# Altium PCB Temperature_Sensor.PcbDoc
Units mm, origin at the board's own origin, x right, y up, seen from the top; angles counter-clockwise.
Board outline 44.14 x 25.42 mm, 2 copper layers (Top Layer, Bottom Layer); 28 components, 20 nets, 102 pads, 11 vias.
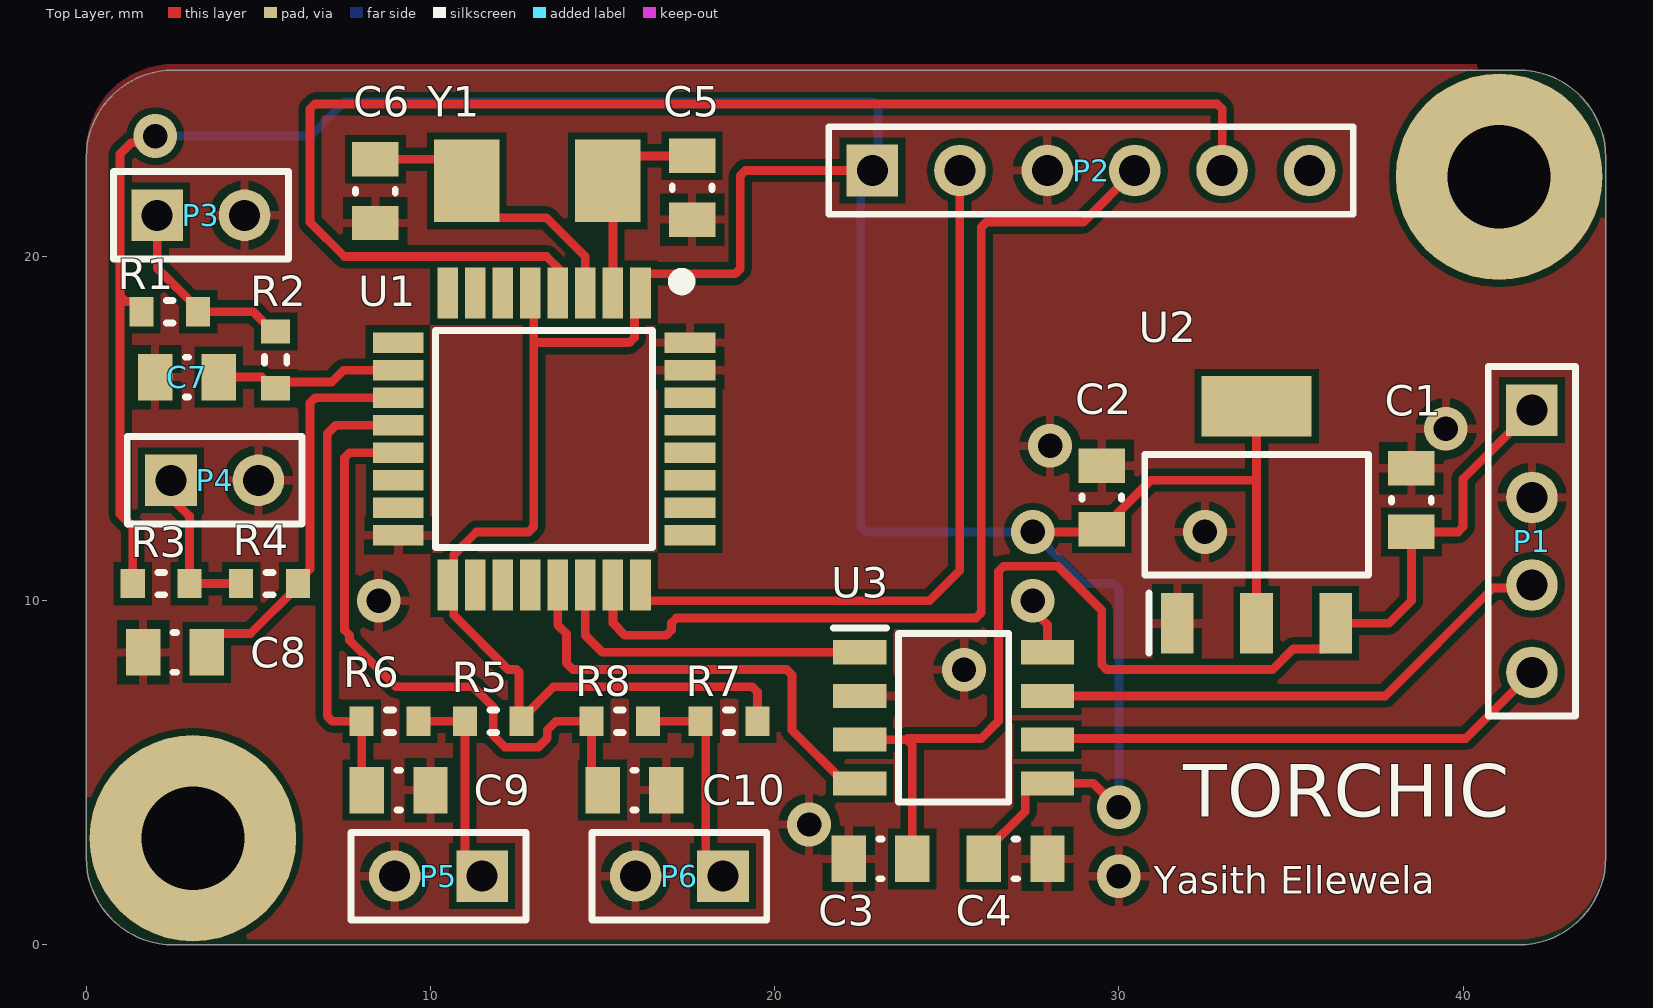
[diagram p0: Top Layer view]
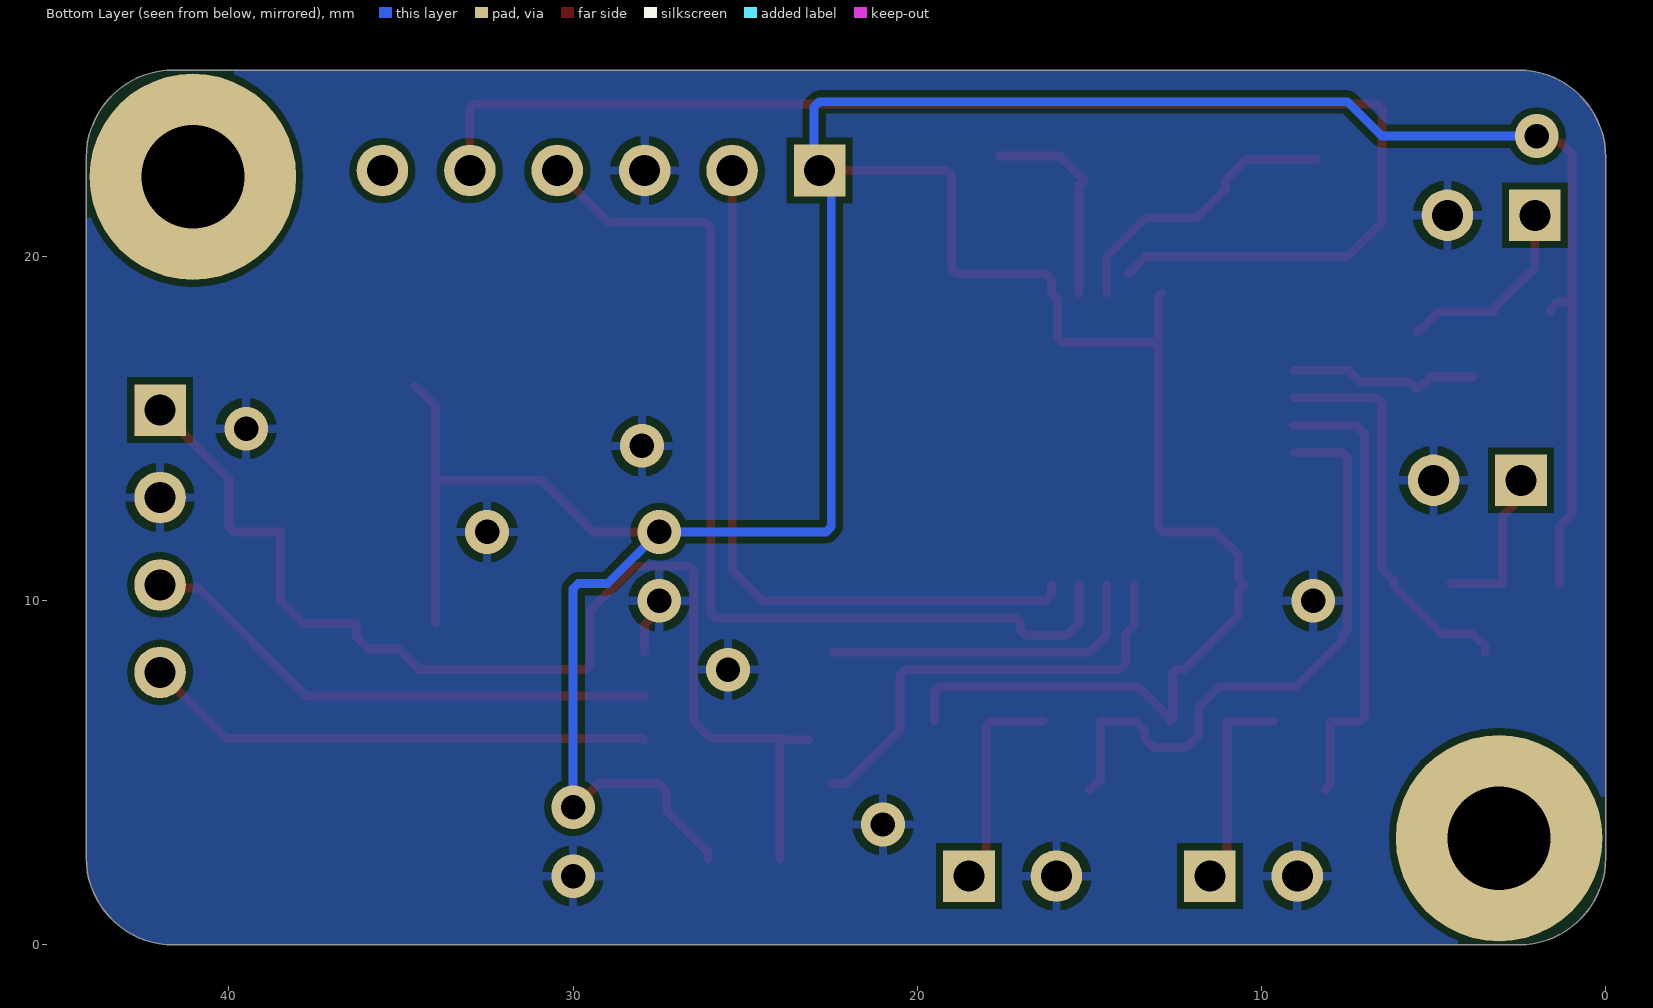
[diagram p1: Bottom Layer view, seen from below]
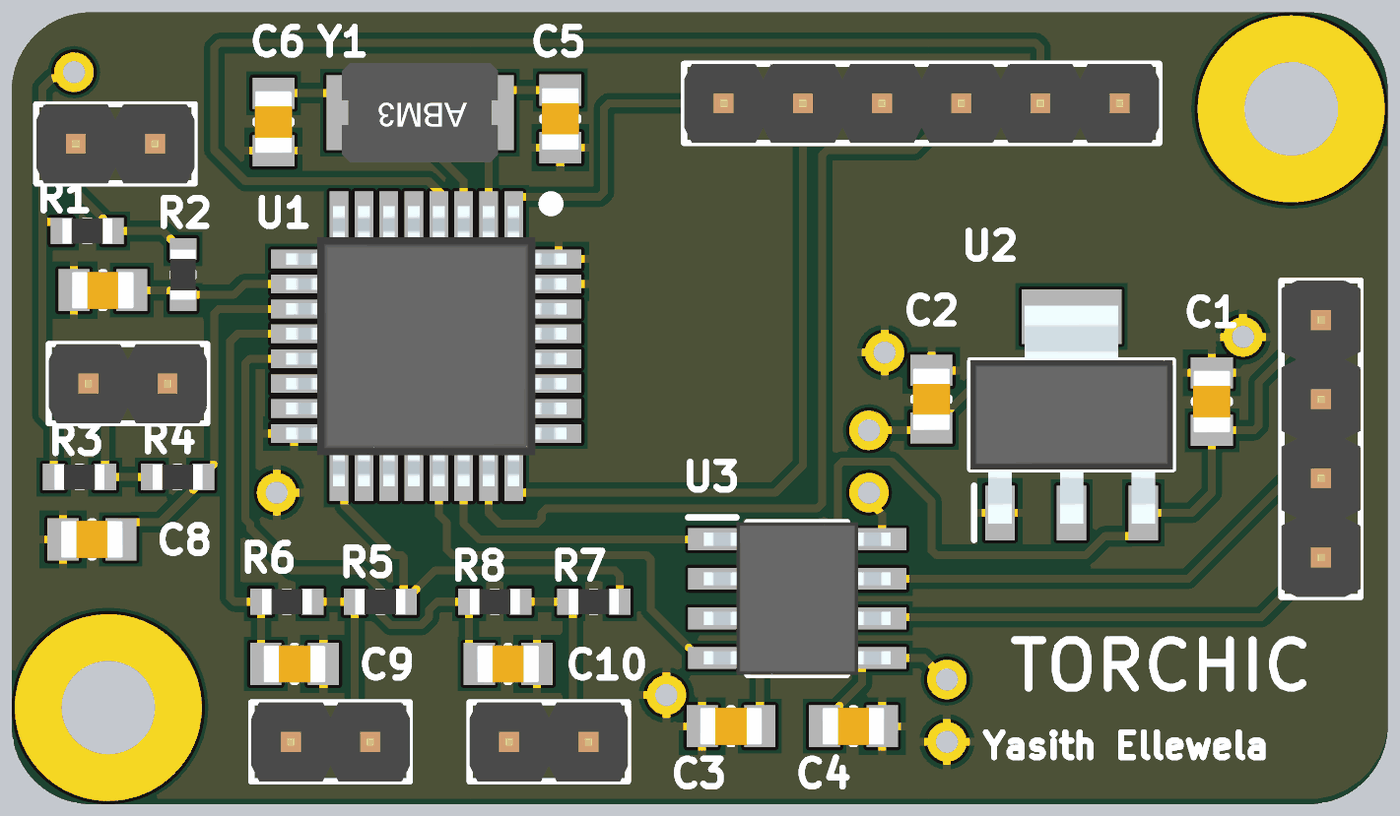
[diagram p2: 3D render of the assembled board from above, using the file's embedded part models]

## Layer stack, top to bottom
Top Solder: solder mask 0.0102, Solder Resist, Dk 3.5
Top Layer: signal copper 0.0356
Dielectric 1: dielectric 0.32, FR-4, Dk 4.8
Bottom Layer: signal copper 0.0356
Bottom Solder: solder mask 0.0102, Solder Resist, Dk 3.5

## Board outline
2.54,0 cw(c2.54,2.54) 0,2.54 0,22.88 cw(c2.54,22.88) 2.54,25.42 41.604,25.42 cw(c41.604,22.88) 44.144,22.88 44.144,2.54 cw(c41.604,2.54) 41.604,0

## Design rules (kind name [scope] priority, off if disabled: settings)
Clearance [All] p1: gap=0.2 ignorepadtopadclearanceinfootprint=TRUE except(0.15: Fill-Text Poly-Text Region-Text)
DiffPairsRouting [All] p1: maxlimit=0.254 minlimit=0.254 mostfreqgap=0.254 substack1={6880419E-5F7E-40DC-B808-49A93CB59D2A} toplayer_{6880419e-5f7e-40dc-b808-49a93cb59d2a}_minwidth=0.381 toplayer_{6880419e-5f7e-40dc-b808-49a93cb59d2a}_maxwidth=0.381 toplayer_{6880419e-5f7e-40dc-b808-49a93cb59d2a}_prefwidth=0.381 bottomlayer_{6880419e-5f7e-40dc-b808-49a93cb59d2a}_minwidth=0.381 bottomlayer_{6880419e-5f7e-40dc-b808-49a93cb59d2a}_maxwidth=0.381 bottomlayer_{6880419e-5f7e-40dc-b808-49a93cb59d2a}_prefwidth=0.381 toplayer_minwidth=0.381 toplayer_maxwidth=0.381 toplayer_prefwidth=0.381 bottomlayer_minwidth=0.381 bottomlayer_maxwidth=0.381 bottomlayer_prefwidth=0.381 maxuncoupledlength=12.7
MinimumSolderMaskSliver [All] p1: minsoldermaskwidth=0.196
PolygonConnect [All] p1: connectstyle=Relief reliefconductorwidth=0.254 reliefentries=4 polygonreliefangle="90 Angle" airgapwidth=0.254
RoutingVias [All] p1: holewidth=0.711 width=1.27 viastyle="Through Hole" minholewidth=0.711 minwidth=1.27 maxholewidth=0.711 maxwidth=1.27
SilkToSolderMaskClearance [IsPad] p1: minsilkscreentomaskgap=0.15 clearancetoexposedcopper=TRUE
SolderMaskExpansion [All] p1: expansion=0.102 istentingtop=FALSE
Width [All] p1: maxlimit=0.508 minlimit=0.254 preferedwidth=0.254 substack1={6880419E-5F7E-40DC-B808-49A93CB59D2A} toplayer_{6880419e-5f7e-40dc-b808-49a93cb59d2a}_maxwidth=0.254 bottomlayer_{6880419e-5f7e-40dc-b808-49a93cb59d2a}_maxwidth=0.254 minimp=50.000000 maximp=50.000000 favimp=50.000000
27 further rules are at their usual default settings.

## Components (designator, comment, footprint, x,y, rotation, side; value= is the part's Value field where it differs from the comment)
C1 "Capacitor - Nonpolarized" "0805 - Capacitor" 38.5,12.925 r270 top value=10uF
C2 "Capacitor - Nonpolarized" "0805 - Capacitor" 29.5,13 r270 top value=10uF
C3 "Capacitor - Nonpolarized" "0805 - Capacitor" 23.075,2.5 r0 top value=100nF
C4 "Capacitor - Nonpolarized" "0805 - Capacitor" 27,2.5 r180 top value=100nF
C5 "Capacitor - Nonpolarized" "0805 - Capacitor" 17.6,22 r270 top value=27pF
C6 "Capacitor - Nonpolarized" "0805 - Capacitor" 8.4,21.9 r270 top value=27pF
C7 "Capacitor - Nonpolarized" "0805 - Capacitor" 2.925,16.5 r0 top value=47nF
C8 "Capacitor - Nonpolarized" "0805 - Capacitor" 2.575,8.5 r0 top value=47nF
C9 "Capacitor - Nonpolarized" "0805 - Capacitor" 9.075,4.5 r180 top value=47nF
C10 "Capacitor - Nonpolarized" "0805 - Capacitor" 15.925,4.5 r180 top value=47nF
P1 "1x4 Header" HDR1X4 42,15.54 r270 top
P2 "1x6 Header" HDR1X6 22.84,22.5 r0 top
P3 "NTC THERMISTOR" HDR1X2 2.06,21.2 r0 top
P4 "NTC THERMISTOR" HDR1X2 2.46,13.5 r0 top
P5 "NTC THERMISTOR" HDR1X2 11.5,2 r180 top
P6 "NTC THERMISTOR" HDR1X2 18.5,2 r180 top
R1 "Resistor" "0603 - Resistor" 2.425,18.4 r180 top value=10K
R2 "Resistor" "0603 - Resistor" 5.5,17 r270 top value=500m
R3 "Resistor" "0603 - Resistor" 2.175,10.5 r180 top value=10K
R4 "Resistor" "0603 - Resistor" 5.325,10.5 r0 top value=500m
R5 "Resistor" "0603 - Resistor" 11.825,6.5 r0 top value=10K
R6 "Resistor" "0603 - Resistor" 8.825,6.5 r180 top value=500m
R7 "Resistor" "0603 - Resistor" 18.675,6.5 r0 top value=10K
R8 "Resistor" "0603 - Resistor" 15.5,6.5 r180 top value=500m
U1 "STM32F303K6T6" QFP80P900X900X160-32N 13.3,14.7 r270 top
U2 "TLV1117-33IDCYR" TLV1117 34,12.5 r90 top
U3 "TJA1051T_3,118" TJA1051T/3,118 25.2,6.6 r0 top
Y1 "Oscillator" "2-SMD NO LEAD CRSYSTAL" 13.1,22.2 r180 top

## Footprints (in the part's own frame and the unit in brackets; to place one, negate y for a bottom-side part, rotate by r counter-clockwise, add the part's x,y. Pads: shape width x height; smd on the part's side, far side on the other; paste and mask are expansions set on the pad)
"2-SMD NO LEAD CRSYSTAL" [mm]
  rect 1.9x2.4 smd: 1(-2.05,0) 2(2.05,0)
  body extent -2.5,-1.6 2.5,1.6, height 1.3
"0603 - Resistor" [mm] "0603 Chip Resistor - IPC Medium Density"
  rect 0.7x0.85 smd: 1(-0.825,0) 2(0.825,0)
  silkscreen extent -0.1,-0.33 0.1,0.33, body extent -0.8,-0.4 0.8,0.4, height 0.45
"0805 - Capacitor" [mm] "0805 Chip Capacitor - IPC Medium Density"
  rect 1x1.35 smd: 1(-0.925,0) 2(0.925,0)
  silkscreen extent -0.05,-0.58 0.05,0.58, body extent -1,-0.6 1,0.6, height 1.2
HDR1X2 [mm] "Connector; Header; 2 Position"
  rect 1.5x1.5 hole 0.9: 1(0,0)
  round 1.5 hole 0.9: 2(2.54,0)
  silkscreen extent -1.27,-1.27 3.81,1.27, body extent -1.27,-1.27 3.81,1.27, height 8.54
HDR1X4 [mm] "Connector; Header; 4 Position"
  rect 1.5x1.5 hole 0.9: 1(0,0)
  round 1.5 hole 0.9: 2(2.54,0) 3(5.08,0) 4(7.62,0)
  silkscreen extent -1.27,-1.27 8.89,1.27, body extent -1.27,-1.27 8.89,1.27, height 8.54
HDR1X6 [mm] "Connector; Header; 6 Position"
  rect 1.5x1.5 hole 0.9: 1(0,0)
  round 1.5 hole 0.9: 2(2.54,0) 3(5.08,0) 4(7.62,0) 5(10.16,0) 6(12.7,0)
  silkscreen extent -1.27,-1.27 13.97,1.27, body extent -1.27,-1.27 13.97,1.27, height 8.54
QFP80P900X900X160-32N [mm]
  rect 1.475x0.6 smd: 1(-4.238,2.8) 2(-4.238,2) 3(-4.238,1.2) 4(-4.238,0.4) 5(-4.238,-0.4) 6(-4.238,-1.2) 7(-4.238,-2) 8(-4.238,-2.8) 17(4.238,-2.8) 18(4.238,-2) 19(4.238,-1.2) 20(4.238,-0.4) 21(4.238,0.4) 22(4.238,1.2) 23(4.238,2) 24(4.238,2.8)
  rect 0.6x1.475 smd: 9(-2.8,-4.238) 10(-2,-4.238) 11(-1.2,-4.238) 12(-0.4,-4.238) 13(0.4,-4.238) 14(1.2,-4.238) 15(2,-4.238) 16(2.8,-4.238) 25(2.8,4.238) 26(2,4.238) 27(1.2,4.238) 28(0.4,4.238) 29(-0.4,4.238) 30(-1.2,4.238) 31(-2,4.238) 32(-2.8,4.238)
  silkscreen extent -4.77,-3.15 3.15,4.2, body extent -4.5,-4.5 4.5,4.5, height 1.6
TJA1051T/3,118 [mm] "SOIC127P600X175-8N"
  rect 1.55x0.7 smd: 1(-2.725,1.905) 2(-2.725,0.635) 3(-2.725,-0.635) 4(-2.725,-1.905) 5(2.725,-1.905) 6(2.725,-0.635) 7(2.725,0.635) 8(2.725,1.905)
  silkscreen extent -3.5,-2.45 1.6,2.61, body extent -3,-2.45 3,2.45, height 1.75
TLV1117 [mm] "SOT230P700X180-4N"
  rect 1.75x0.95 smd: 1(-3.15,2.3) 2(-3.15,0) 3(-3.15,-2.3)
  rect 1.75x3.2 smd: 2(3.15,0)
  silkscreen extent -4.03,-3.25 1.75,3.25, body extent -3.5,-3.25 3.5,3.25, height 1.8

## Part data
C1 C2 C3 C4 C5 C6 C7 C8 C9 C10: "Nonpolarized Capacitor"
P1: "1x4 Pin Header"
P2: "1x6 Pin Header"
P3 P4 P5 P6: library part "1x2 Header", "1x2 Pin Header"
U1: "Integrated Circuit"
U2: "Linear Voltage Regulator IC 3.3V 800MA SOT223-4", Manufacturer="Texas Instruments", Supplier Part Number=296-21112-1-ND, Datasheet=http://www.ti.com/lit/ds/symlink/tlv1117.pdf?HQS=TI-null-null-digikeymode-df-pf-null-wwe&ts=1590668900314, Manufacturer Part Number=TLV1117-33IDCYR, Supplier=Digikey
U3: "CAN Transceiver IC 4.5V-5.5V 250ns", Manufacturer=NXP, Manufacturer Part Number=TJA1051T/3,118, Supplier Part Number=568-8684-1-ND, Datasheet=http://www.nxp.com/docs/en/data-sheet/TJA1051.pdf, Supplier=Digikey
Y1: "Crystal Oscillator"

## Free pads (board coordinates)
  round 6 hole 3: MOUNT1(41.044,22.32) MOUNT2(3.1,3.1)

## Via types
v1: diameter 1.27, hole 0.711, Top Layer to Bottom Layer, 11 vias

## Nets (pads, with @x,y where several pads share a name; then routed paths per layer and width w, separated by ;. In a path a pad name is that pad's centre, name@x,y a point inside that pad or via, vN(x,y) a via of type N, cw(c..) or ccw(c..) an arc to the next point about the centre after c; other vN are vias at no path point)
+3.3V: C2.2 C4.2 P2.1 R1.2 R3.2 R5.2 R7.2 U1.1 U1.5 U1.17 U2.2 U3.5 | length 121
  Top Layer w0.254: R3.2 1.35,12.148 0.983,12.515 0.983,18.847 ; R1.2 1.6,18.475 1.377,18.698 1.132,18.698 0.983,18.847 ; v1(2,23.5) 1.806,23.306 1.306,23.306 0.983,22.983 0.983,18.847 ; U1.5 13,18.838 13,12.149 12.851,12 11.338,12 10.673,11.335 10.673,10.635 U1.17 10.673,10.289 10.673,9.589 12.262,8 12.5,8 12.575,7.925 12.575,6.575 R5.2 12.65,6.575 13.575,7.5 19.351,7.5 19.5,7.351 R7.2 ; 13,17.5 15.778,17.5 15.927,17.649 15.927,18.765 U1.1 16.1,19.327 16.273,19.5 18.851,19.5 19,19.649 19,22.351 19.149,22.5 P2.1 ; C4.2 26.075,2.675 27.277,3.877 27.277,4.472 27.5,4.695 U3.5 29.258,4.695 29.953,4 v1(30,4) ; v1(27.5,12) 29.425,12 C2.2 30.925,13.5 34,13.5 ; U2.2@34,9.35 34,13.5 ; U2.2@34.58,16.23 34,15.65 34,13.5
  Bottom Layer w0.254: v1(2,23.5) 6.5,23.5 7.5,24.5 22.851,24.5 23,24.351 23,22.66 P2.1 22.5,22.16 22.5,12.149 22.649,12 v1(27.5,12) 29,10.5 29.851,10.5 30,10.351 v1(30,4)
+5V: C1.2 C3.2 P1.1 U2.3 U3.3 | length 34.8
  Top Layer w0.254: U3.3@23.163,5.965 23.851,5.965 24,5.816 C3.2 ; 23.851,6 26,6 26.5,6.5 26.5,10.851 26.649,11 28.225,11 29.5,9.725 29.5,8.149 29.649,8 34.462,8 35.064,8.602 35.952,8.602 36.3,8.95 U2.3 37.85,9.35 38.5,10 C1.2 39.851,12 40,12.149 40,13.54 41.5,15.04 41.5,15.5 41.96,15.5 P1.1
"ADC 0": C7.2 R2.2 U1.10 | length 5.6
  Top Layer w0.254: C7.2 5.1,16.5 5.425,16.175 R2.2 5.679,16.354 7.128,16.354 7.474,16.7 U1.10
"ADC 1": C8.2 R4.2 U1.11 | length 11.6
  Top Layer w0.254: C8.2 3.5,8.675 3.873,9.048 4.773,9.048 R4.2@6.15,10.425 ; R4.2 6.15,10.575 6.5,10.925 6.5,15.751 6.649,15.9 U1.11
"ADC 2": C9.2 R6.2 U1.12 | length 13.5
  Top Layer w0.254: C9.2 8,4.65 R6.2 7.149,6.5 7,6.649 7,14.851 7.249,15.1 U1.12
"ADC 3": C10.2 R8.2 U1.13 | length 18.4
  Top Layer w0.254: U1.13 7.649,14.3 7.5,14.151 7.5,9.149 7.649,9 7.649,8.851 9,7.5 11.237,7.5 11.825,6.912 11.825,6.088 12.165,5.748 13.135,5.748 13.392,6.005 13.392,6.243 13.649,6.5 R8.2 14.675,4.825 C10.2
CANH: P1.3 U3.7 | length 15.4
  Top Layer w0.254: U3.7 37.735,7.235 40.869,10.369 41.909,10.369 P1.3
CANL: P1.4 U3.6 | length 14.9
  Top Layer w0.254: U3.6 27.96,6 40.08,6 P1.4
CANRX: U1.21 U3.4 | length 13.3
  Top Layer w0.254: U1.21 13.7,9.293 13.954,9.039 13.954,8.188 14.142,8 20.351,8 20.5,7.851 20.5,6.245 22.05,4.695 U3.4
CANTX: U1.22 U3.1 | length 9.6
  Top Layer w0.254: U1.22 14.5,9 14.995,8.505 U3.1
GND: C1.1 C2.1 C3.1 C4.1 C5.2 C6.2 C7.1 C8.1 C9.1 C10.1 P1.2 P2.3 P3.2 P4.2 P5.2 P6.2 U1.16 U1.31 U1.32 U2.1 U3.2 U3.8 | length 1.7
  Top Layer w0.254: v1(27.5,10) 27.5,9.725 27.925,9.3 U3.8
  other v1: 30,2 21,3.5 25.5,8 8.5,10 32.5,12 28,14.5 39.5,15
NetP3_1: P3.1 R1.1 R2.1 | length 5.8
  Top Layer w0.254: P3.1 2.06,19.665 3.25,18.475 R1.1 4.85,18.4 5.425,17.825 R2.1
NetP4_1: P4.1 R3.1 R4.1 | length 4.8
  Top Layer w0.254: P4.1@2.06,13.4 3,12.46 R3.1 R4.1
NetP5_1: P5.1 R5.1 R6.1 | length 6.1
  Top Layer w0.254: R6.1 R5.1 11,2.5 P5.1
NetP6_1: P6.1 R7.1 R8.1 | length 6.3
  Top Layer w0.254: R8.1 R7.1 18,6.35 18,2.5 P6.1
NRST: P2.5 U1.4 | length 39.7
  Top Layer w0.254: U1.4@13.873,19.5 13.37,20.002 10.065,20.002 10.062,20 7.5,20 6.5,21 6.5,24.287 6.649,24.436 32.851,24.436 33,24.287 P2.5
RCC_OSC_IN: C5.1 U1.2 Y1.1 | length 6.1
  Top Layer w0.254: U1.2 15.3,22.05 Y1.1 15.875,22.925 C5.1
RCC_OSC_OUT: C6.1 U1.3 Y1.2 | length 8.5
  Top Layer w0.254: C6.1 10.425,22.825 Y1.2 11.05,21.95 11.873,21.127 13.373,21.127 14.5,20 U1.3
SWCLK: P2.2 U1.24 | length 21.6
  Top Layer w0.254: U1.24 16.1,10.173 16.273,10 24.5,10 25.38,10.88 P2.2
SWDIO: P2.4 U1.23 | length 28.7
  Top Layer w0.254: U1.23 15.305,10.457 15.305,9.343 15.649,9 16.851,9 17,9.149 17,9.351 17.149,9.5 25.851,9.5 26,9.649 26,20.851 26.149,21 28.96,21 P2.4
pads on no net: P2.6 U1.6 U1.7 U1.8 U1.9 U1.14 U1.15 U1.18 U1.19 U1.20 U1.25 U1.26 U1.27 U1.28 U1.29 U1.30

## Polygon pours and split planes (outlines as drawn)
GND on Bottom Layer "GND_L02_P007" (solid, pour order 7): 2.54,0 cw(c2.54,2.54) 0,2.54 0,22.88 cw(c2.54,22.88) 2.54,25.42 41.604,25.42 cw(c41.604,22.88) 44.144,22.88 44.144,2.54 cw(c41.604,2.54) 41.604,0
GND on Top Layer "GND_L01_P006" (solid, remove dead copper, pour order 6): 2.54,0.167 cw(c2.54,2.707) 0,2.707 0,23.047 cw(c2.54,23.047) 2.54,25.587 41.604,25.587 cw(c41.604,23.047) 44.144,23.047 44.144,2.707 cw(c41.604,2.707) 41.604,0.167

## Silkscreen, mask and mechanical layers (free items; w line width, h text height)
Top Overlay:
  text "TORCHIC" at 31.874,3.726 h1.52
  text "Yasith Ellewela" at 31.006,1.494 h0.8
Mechanical 1:
  lines w0.025: 37.592,-0.013 2.54,-0.013 cw(c2.54,2.54) -0.013,2.54 -0.013,22.86 cw(c2.54,22.86) 2.54,25.413 37.592,25.413
  lines w0.1: -0.05,2.54 ccw(c2.54,2.54) 2.54,-0.05 41.604,-0.05 ccw(c41.604,2.54) 44.194,2.54 44.194,22.88 ccw(c41.604,22.88) 41.604,25.47 2.54,25.47 ccw(c2.54,22.88) -0.05,22.88 -0.05,2.54